# Altium PCB BLDC_Board_Layout_Alternative.PcbDoc
Units mil, origin at the board's own origin, x right, y up, seen from the top; angles counter-clockwise.
Board outline 4105.03 x 2702.53 mil, 2 copper layers (Top Layer, Bottom Layer); 100 components, 78 nets, 393 pads, 439 vias.
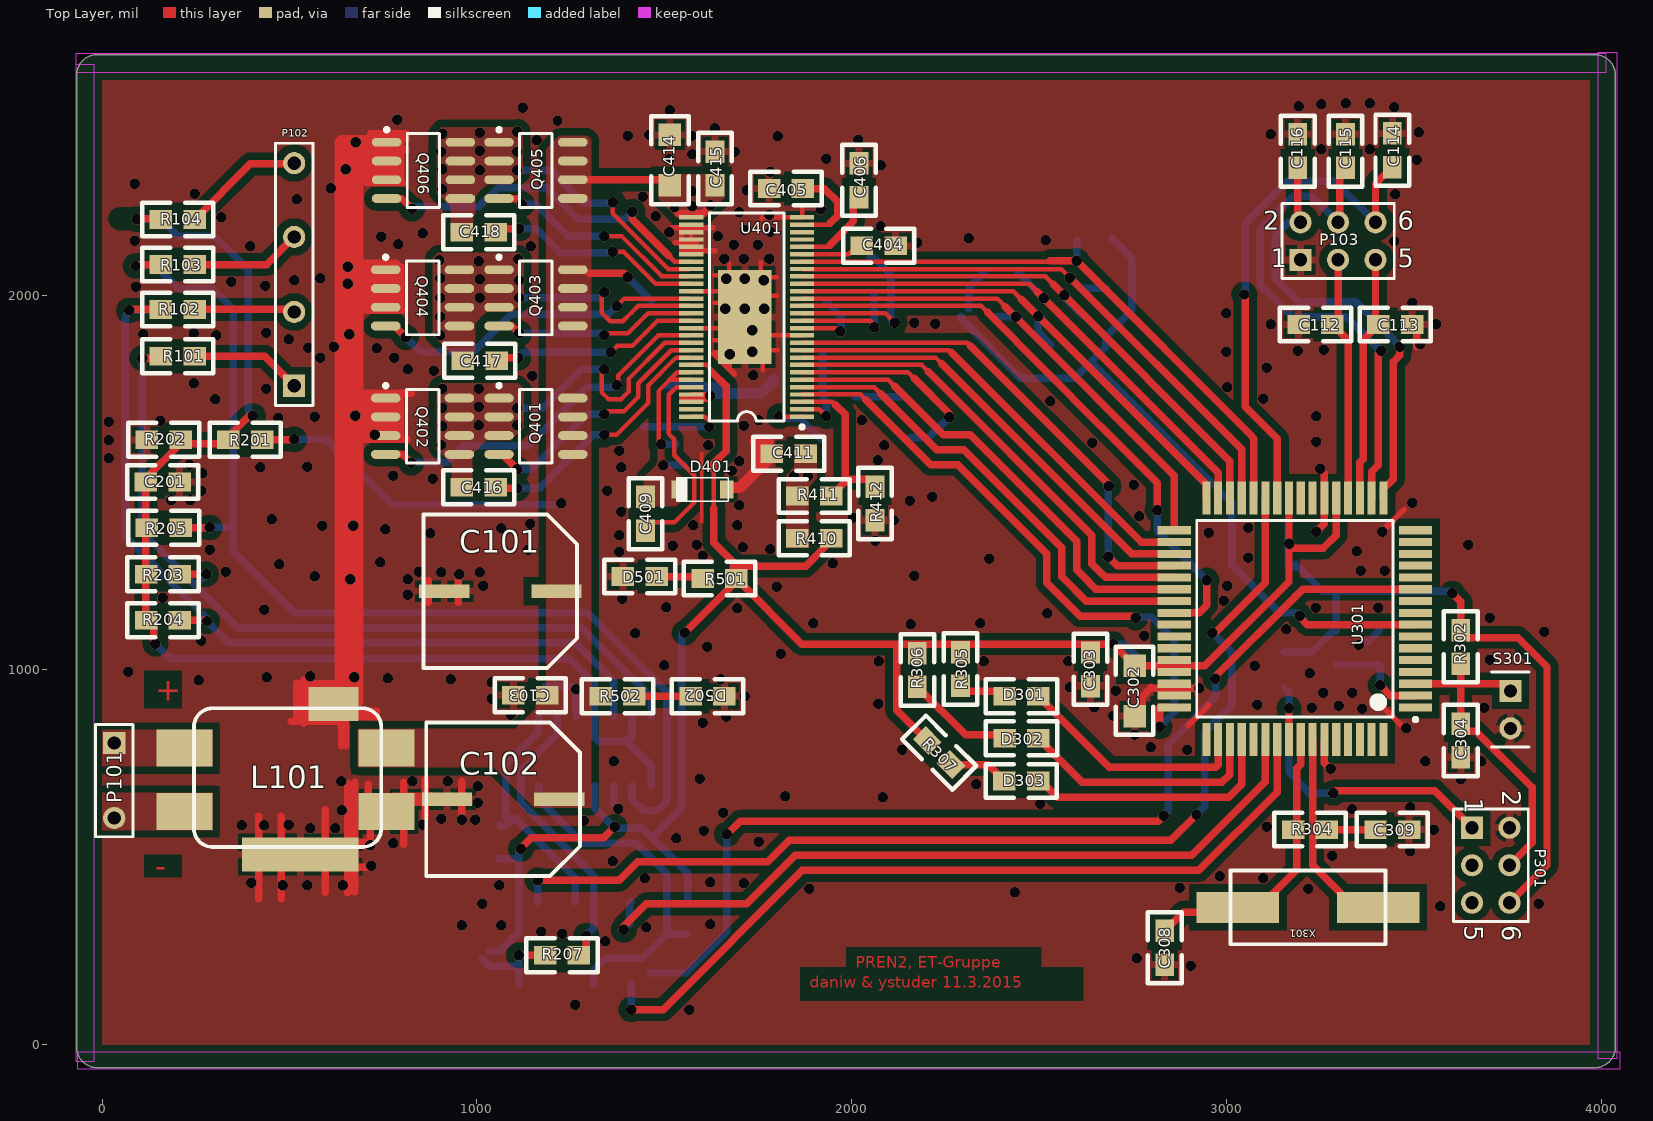
[diagram p0: Top Layer view]
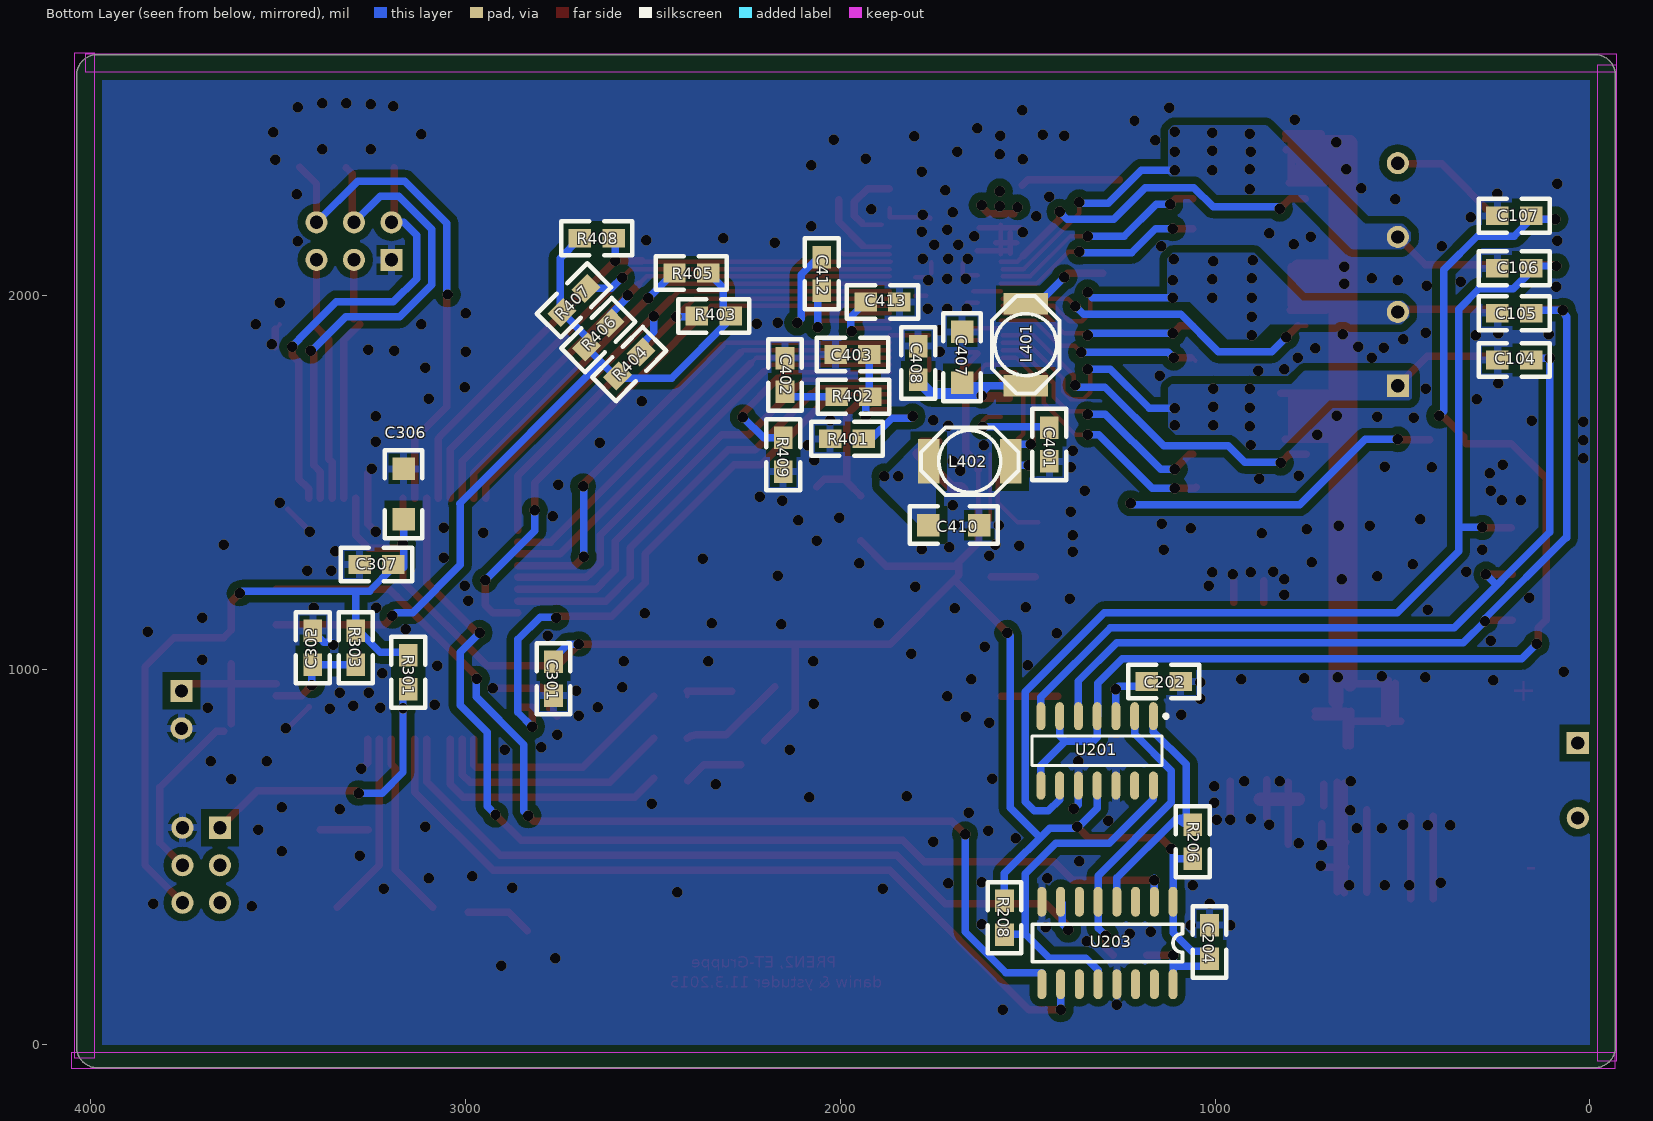
[diagram p1: Bottom Layer view, seen from below]

## Layer stack, top to bottom
Top Solder: solder mask 0.4, Solder Resist, Dk 3.5
Top Layer: signal copper 1.4
Dielectric 1: dielectric 12.6, FR-4, Dk 4.8
Bottom Layer: signal copper 1.4
Bottom Solder: solder mask 0.4, Solder Resist, Dk 3.5

## Board outline
-67.91,-6.03 ccw(c-12.89,-6.03) -12.89,-61.04 3982.11,-61.04 ccw(c3982.11,-6.03) 4037.12,-6.03 4037.12,2581.47 ccw(c4032.11,2581.47) 4036.46,2583.97 ccw(c4032.11,2586.47) 4037.12,2586.47 ccw(c3982.11,2586.47) 3982.11,2641.49 -12.89,2641.49 ccw(c-12.89,2586.47) -67.91,2586.47

## Design rules (kind name [scope] priority, off if disabled: settings)
Clearance HCS08 [(InComponent('U301')) and ispad vs (InComponent('U301')) and ispad] p1: gap=5
Clearance [All] p2: gap=20
PolygonConnect SpecGND [InNamedPolygon('SpezGND') vs OnBottomLayer Or OnTopLayer] p1: connectstyle=Direct reliefconductorwidth=10 reliefentries=4 polygonreliefangle="90 Angle" airgapwidth=10
PolygonConnect PolygonConnect_M_X [InNet('M_W') or InNet('M_V') or InNet('M_U') or InNet('VCCH') or InNet('PWR_+') or InNet('PWR_-') or InNet('VCC_OUT') or InNet('NETC409_1') vs OnBottomLayer Or OnTopLayer] p2: connectstyle=Direct reliefconductorwidth=10 reliefentries=4 polygonreliefangle="90 Angle" airgapwidth=10
PolygonConnect PolygonConnect_Via [IsVia vs OnBottomLayer Or OnTopLayer] p3: connectstyle=Direct reliefconductorwidth=10 reliefentries=4 polygonreliefangle="90 Angle" airgapwidth=10
PolygonConnect PolygonConnect_1 [All] p4: connectstyle=Relief reliefconductorwidth=20 reliefentries=4 polygonreliefangle="90 Angle" airgapwidth=10
RoutingVias [All] p1: holewidth=28 width=28 viastyle="Through Hole" minholewidth=28 minwidth=28 maxholewidth=28 maxwidth=28
SolderMaskExpansion [All] p1: expansion=4
UnpouredPolygon [All] p1: allowunpoured=FALSE
Width [All] p1: maxlimit=50 minlimit=12 preferedwidth=12
29 further rules are at their usual default settings.

## Components (designator, comment, footprint, x,y, rotation, side; value= is the part's Value field where it differs from the comment)
C101 "100uF" ElkoFootprint 1062.5,1210 r180 top
C102 "100uF" ElkoFootprint 1070,655 r180 top
C103 "100n" 0805 1187.5,932.5 r180 top
C104 "100p" 0805 157.11,1826.47 r0 bottom
C105 "100p" 0805 157.11,1951.47 r0 bottom
C106 "100p" 0805 157.11,2071.47 r0 bottom
C107 "100p" 0805 157.11,2211.47 r0 bottom
C112 "240p" 0805 3282.11,1921.47 r180 top
C113 "240p" 0805 3404.61,1921.47 r0 top
C114 "240p" 0805 3442.11,2341.47 r90 top
C115 "240p" 0805 3317.11,2338.97 r90 top
C116 "240p" 0805 3189.61,2338.97 r90 top
C201 "100n" 0805 117.11,1501.47 r0 top
C202 "100n" 0805 1182.11,968.97 r180 bottom
C204 "100n" 0805 1014.61,229 r90 bottom
C301 "100nF" 0805 2764.61,1021.47 r270 bottom
C302 "10uF" 1206 2754.61,1011.47 r270 top
C303 "100nF" 0805 2637.11,1046.47 r270 top
C304 "100nF" 0805 3624.61,856.47 r270 top
C305 "100nF" 0805 3407.11,1013.97 r90 bottom
C306 "4.7uF" 1206 3164.61,1401.47 r90 bottom
C307 "470nF" 0805 3192.11,1281.47 r0 bottom
C308 "16pF" 0805 2834.61,213.97 r90 top
C309 "16pF" 0805 3487.11,573.97 r180 top
C401 "15n" 0805 1442.11,1556.47 r90 bottom
C402 "6.8n" 0805 2147.11,1741.47 r90 bottom
C403 "120p" 0805 1922.11,1841.47 r0 bottom
C404 "1u" 0805 2027.11,2131.47 r0 top
C405 "1u" 0805 1869.61,2283.97 r180 top
C406 "240p" 0805 2019.61,2261.47 r90 top
C407 "4.7uF" 1206 1674.61,1766.47 r90 bottom
C408 "100n" 0805 1792.11,1773.97 r90 bottom
C409 "100n" 0805 1449.61,1461.47 r270 top
C410 "4.7uF" 1206 1764.61,1386.47 r180 bottom
C411 "100n" 0805 1877.11,1576.47 r180 top
C412 "22n" 0805 2049.61,2101.47 r270 bottom
C413 "2.2u" 0805 1932.11,1981.47 r180 bottom
C414 "4.7uF" 1206 1515,2292.5 r90 top
C415 "100n" 0805 1635,2382.5 r270 top
C416 "100n" 0805 960,1487.5 r0 top
C417 "100n" 0805 962.5,1825 r0 top
C418 "100n" 0805 960,2167.5 r0 top
D301 "LED" 0805 2497.5,930 r180 top
D302 "LED" 0805 2497.5,817.5 r180 top
D303 "LED" 0805 2497.11,703.97 r180 top
D401 "MBR0560" SOD-123 1602.11,1481.47 r0 top
D501 "LED" 0805 1389.61,1248.97 r0 top
D502 "LED" 0805 1660,930 r180 top
L101 "Filter" BNX 145,462.5 r0 top
L401 "1mH" SRR6603 1505,1867.5 r90 bottom
L402 "1mH" SRR6603 1654.61,1556.47 r0 bottom
P101 "PWR" Stecker_1x2_200mil 32.5,705 r270 top
P102 "Motor" Stecker_1x4_200mil 512.5,2055 r90 top
P103 "Header 3X2" HDR2X3 3197.11,2093.97 r0 top
P301 "BDM" HDR2X3 3654.61,578.97 r270 top
Q401 "Si4178DY" SO-8_N 1157.5,1650 r0 top
Q402 "Si4178DY" SO-8_N 855,1650 r0 top
Q403 "Si4178DY" SO-8_N 1157.5,1992.5 r0 top
Q404 "Si4178DY" SO-8_N 855,1992.5 r0 top
Q405 "Si4178DY" SO-8_N 1157.5,2332.5 r0 top
Q406 "Si4178DY" SO-8_N 857.5,2332.5 r0 top
R101 "33" 0805 247.11,1836.47 r180 top
R102 "33" 0805 247.11,1961.47 r180 top
R103 "33" 0805 247.11,2081.47 r180 top
R104 "33" 0805 247.11,2201.47 r180 top
R201 "1M" 0805 337.11,1613.97 r0 top
R202 "1M" 0805 119.61,1613.97 r0 top
R203 "10k" 0805 117.5,1255 r0 top
R204 "10k" 0805 117.5,1132.5 r0 top
R205 "10k" 0805 119.61,1378.97 r0 top
R206 "10k" 0805 1059.61,586.5 r270 bottom
R207 "10k" 0805 1272.11,238.97 r180 top
R208 "10k" 0805 1562.11,294 r90 bottom
R301 "4.7k" 0805 3152.11,1038.97 r270 bottom
R302 "10k" 0805 3624.61,1106.47 r270 top
R303 "10k" 0805 3292.11,1103.97 r270 bottom
R304 "10M" 0805 3177.11,573.97 r0 top
R305 "330" 0805 2290,957.5 r90 top
R306 "330" 0805 2175,955 r90 top
R307 "330" 0805 2265,747.5 r135 top
R401 "205k" 0805 1937.11,1616.47 r0 bottom
R402 "16.2k" 0805 2009.61,1728.97 r180 bottom
R403 "10k" 0805 2292.11,1943.97 r0 bottom
R404 "10k" 0805 2594.61,1783.97 r135 bottom
R405 "10k" 0805 2352.11,2058.97 r0 bottom
R406 "10k" 0805 2677.11,1861.47 r135 bottom
R407 "10k" 0805 2742.11,1953.97 r135 bottom
R408 "10k" 0805 2694.61,2151.47 r180 bottom
R409 "0" 0805 2152.11,1528.97 r90 bottom
R410 "0" 0805 1944.61,1351.47 r180 top
R411 "30k" 0805 1944.61,1463.97 r180 top
R412 "10k" 0805 2062.11,1398.97 r90 top
R501 "330" 0805 1602.11,1243.97 r0 top
R502 "1.2k" 0805 1420,930 r180 top
S301 "RST" HDR1X2 3757.11,943.97 r270 top
U201 "LM339AD" D014_L 1314.61,784 r270 bottom
U203 "MC74HC175" SO-16 1112.11,381.5 r270 bottom
U301 "MC9S08JM60CQH" QFP64(14x14) 3182.11,1136.47 r180 top
U401 "DRV8301" HTSSOP56 1714.61,1941.47 r90 top
X301 "12MHz" HC/49US 3217.11,366.47 r0 top

## Footprints (in the part's own frame and the unit in brackets; to place one, negate y for a bottom-side part, rotate by r counter-clockwise, add the part's x,y. Pads: shape width x height; smd on the part's side, far side on the other; paste and mask are expansions set on the pad)
0805 [mil]
  rect 60x50 smd: 1(0,0) 2(90,0)
  silkscreen extent -50,-45 140,45
1206 [mil]
  rect 60x60 smd: 1(0,0) 2(135,0)
  silkscreen extent -50,-50 185,50
BNX [mm]
  rect 3.8x2.5 smd: 1(1.9,8.35) 2(1.9,4.05) 4(15.6,4.05) 5(15.6,8.35)
  rect 7.9x2.3 smd: 3(9.75,1.15)
  rect 3.4x2.3 smd: 6(12,11.35)
  silkscreen extent 2.54,1.65 15.24,11.05
D014_L [mm] "SOIC, 14-Leads, Body 8.7x3.9mm, Pitch 1.27mm, IPC High Density"
  oval 1.9x0.6 smd: 1(-2.35,3.81) 2(-2.35,2.54) 3(-2.35,1.27) 4(-2.35,0) 5(-2.35,-1.27) 6(-2.35,-2.54) 7(-2.35,-3.81) 8(2.35,-3.81) 9(2.35,-2.54) 10(2.35,-1.27) 11(2.35,0) 12(2.35,1.27) 13(2.35,2.54) 14(2.35,3.81)
  silkscreen extent -2.47,-4.4 1,4.78, body extent -2,-4.38 2,4.38, height 1.75
ElkoFootprint [mm]
  rect 3.4x0.9 smd: +(-3.8,0) -(3.8,0)
  silkscreen extent -5.2,-5.2 5.21,5.21
HC/49US [mm] "ABLS HC/49US Quarz"
  rect 5.6x2.1 smd: 1(-4.75,0) 2(4.75,0)
  silkscreen extent -5.25,-2.5 5.25,2.5
HDR1X2 [mm] "Connector; Header; 2 Position"
  rect 1.5x1.5 hole 0.9: 1(0,0)
  round 1.5 hole 0.9: 2(2.54,0)
  silkscreen extent -1.27,-1.27 3.81,1.27
HDR2X3 [mm] "Connector; Header; 3x2 Position"
  rect 1.5x1.5 hole 0.9: 1(0,0)
  round 1.5 hole 0.9: 2(0,2.54) 3(2.54,0) 4(2.54,2.54) 5(5.08,0) 6(5.08,2.54)
  silkscreen extent -1.27,-1.27 6.35,3.81
HTSSOP56 [mm] "Shrink Small Outline; 56 Leads; Body Width 6.1 mm; Pitch 0.5 mm"
  rect 0.3x1.65 smd: 1(-6.75,-3.879) 2(-6.25,-3.879) 3(-5.75,-3.879) 4(-5.25,-3.879) 5(-4.75,-3.879) 6(-4.25,-3.879) 7(-3.75,-3.879) 8(-3.25,-3.879) 9(-2.75,-3.879) 10(-2.25,-3.879) 11(-1.75,-3.879) 12(-1.25,-3.879) 13(-0.75,-3.879) 14(-0.25,-3.879) 15(0.25,-3.879) 16(0.75,-3.879) 17(1.25,-3.879) 18(1.75,-3.879) 19(2.25,-3.879) 20(2.75,-3.879) 21(3.25,-3.879) 22(3.75,-3.879) 23(4.25,-3.879) 24(4.75,-3.879) 25(5.25,-3.879) 26(5.75,-3.879) 27(6.25,-3.879) 28(6.75,-3.879) 29(6.75,3.625) 30(6.25,3.625) 31(5.75,3.625) 32(5.25,3.625) 33(4.75,3.625) 34(4.25,3.625) 35(3.75,3.625) 36(3.25,3.625) 37(2.75,3.625) 38(2.25,3.625) 39(1.75,3.625) 40(1.25,3.625) 41(0.75,3.625) 42(0.25,3.625) 43(-0.25,3.625) 44(-0.75,3.625) 45(-1.25,3.625) 46(-1.75,3.625) 47(-2.25,3.625) 48(-2.75,3.625) 49(-3.25,3.625) 50(-3.75,3.625) 51(-4.25,3.625) 52(-4.75,3.625) 53(-5.25,3.625) 54(-5.75,3.625) 55(-6.25,3.625) 56(-6.75,3.625)
  rect 6.35x3.61 smd: 57(0,0)
  silkscreen extent -7.57,-4 7.05,2.41
QFP64(14x14) [mm] "QFP, 64-Leads, Body 17,5x17,5mm (max), Pitch 0,80mm, IPC Low Density"
  rect 2.25x0.55 smd: 1(-8.175,6) 2(-8.175,5.2) 3(-8.175,4.4) 4(-8.175,3.6) 5(-8.175,2.8) 6(-8.175,2) 7(-8.175,1.2) 8(-8.175,0.4) 9(-8.175,-0.4) 10(-8.175,-1.2) 11(-8.175,-2) 12(-8.175,-2.8) 13(-8.175,-3.6) 14(-8.175,-4.4) 15(-8.175,-5.2) 16(-8.175,-6) 33(8.175,-6) 34(8.175,-5.2) 35(8.175,-4.4) 36(8.175,-3.6) 37(8.175,-2.8) 38(8.175,-2) 39(8.175,-1.2) 40(8.175,-0.4) 41(8.175,0.4) 42(8.175,1.2) 43(8.175,2) 44(8.175,2.8) 45(8.175,3.6) 46(8.175,4.4) 47(8.175,5.2) 48(8.175,6)
  rect 0.55x2.25 smd: 17(-6,-8.175) 18(-5.2,-8.175) 19(-4.4,-8.175) 20(-3.6,-8.175) 21(-2.8,-8.175) 22(-2,-8.175) 23(-1.2,-8.175) 24(-0.4,-8.175) 25(0.4,-8.175) 26(1.2,-8.175) 27(2,-8.175) 28(2.8,-8.175) 29(3.6,-8.175) 30(4.4,-8.175) 31(5.2,-8.175) 32(6,-8.175) 49(6,8.175) 50(5.2,8.175) 51(4.4,8.175) 52(3.6,8.175) 53(2.8,8.175) 54(2,8.175) 55(1.2,8.175) 56(0.4,8.175) 57(-0.4,8.175) 58(-1.2,8.175) 59(-2,8.175) 60(-2.8,8.175) 61(-3.6,8.175) 62(-4.4,8.175) 63(-5.2,8.175) 64(-6,8.175)
  silkscreen extent -8.3,-6.65 6.65,6.95, body extent -7,-7 7,7, height 2.45
SO-8_N [mm] "SOIC, 8-Leads, Body 4.9x3.9mm, Pitch 1.27mm, IPC Medium Density"
  oval 2x0.6 smd: 1(-2.5,1.905) 2(-2.5,0.635) 3(-2.5,-0.635) 4(-2.5,-1.905) 5(2.5,-1.905) 6(2.5,-0.635) 7(2.5,0.635) 8(2.5,1.905)
  silkscreen extent -2.62,-2.5 1.1,2.88, body extent -2,-2.5 2,2.5, height 1.75
SO-16 [mil]
  oval 80x24 smd: 1(0,0) 2(0,-50) 3(0,-100) 4(0,-150) 5(0,-200) 6(0,-250) 7(0,-300) 8(0,-350) 9(220,-350) 10(220,-300) 11(220,-250) 12(220,-200) 13(220,-150) 14(220,-100) 15(220,-50) 16(220,0)
  silkscreen extent 60,-375 160,25
SOD-123 [mil]
  rect 36x48 smd: A(64.5,0) K(-64.5,0)
  silkscreen extent -69,-31 69,31
SRR6603 [mm]
  rect 1.45x3 smd: 1(-2.775,0) 2(2.775,0)
  silkscreen extent -3.3,-2.29 3.3,2.29
Stecker_1x2_200mil [mm]
  rect 1.5x1.5 hole 0.9: 1(-2.54,0)
  round 1.5 hole 0.9: 2(2.54,0)
  silkscreen extent -3.81,-1.27 3.81,1.27
Stecker_1x4_200mil [mm]
  rect 1.5x1.5 hole 0.9: 1(-7.54,0)
  round 1.5 hole 0.9: 2(-2.54,0) 3(2.54,0) 4(7.54,0)
  silkscreen extent -8.89,-1.27 8.89,1.27

## Part data
C101 C102: library part Elko_SMD
C103 C104 C105 C106 C107 C112 C113 C114 C115 C116 C201 C202 C204 C301 C303 C304 C305 C307 C308 C309 C401 C402 C403 C404 C405 C406 C408 C409 C411 C412 C413 C415 C416 C417 C418: library part C?, "Normaler Kondensator"
C302 C306 C407 C410 C414: library part "C? ELKO", "Elektrolyt /polarisierter Kondensator"
D401: library part DiodeSchottky, "Schottky Diode"
L101: library part CommonFilter
L401 L402: library part L?, "SRR1005-122K"
P101 S301: library part "Header 2", "Header, 2-Pin"
P102: library part "Header 4", "Header, 4-Pin"
P103: "Header, 3-Pin, Dual row"
P301: library part "Header 3X2", "Header, 3-Pin, Dual row"
Q401 Q402 Q403 Q404 Q405 Q406: library part SI4412DY, "N-Channel 30V (D-S)  Rated MOSFET"
R101 R102 R103 R104 R201 R202 R203 R204 R205 R206 R207 R208 R301 R302 R303 R304 R305 R306 R307 R401 R402 R403 R404 R405 R406 R407 R408 R409 R410 R411 R412 R501 R502: library part R?, "Normaler Widerstand"
U201: "Quad Differential Comparator"
U203: "QUAD D-TYPE FF CR"
U301: library part MC9S08JM60, "MCU"
X301: library part CRYSTAL

## Via types
v1: diameter 28, hole 28, Top Layer to Bottom Layer, tented both sides, 352 vias
v2: diameter 28, hole 28, Top Layer to Bottom Layer, 86 vias
v3: diameter 28, hole 28, Top Layer to Bottom Layer, tented bottom, 1 vias

## Nets (pads, with @x,y where several pads share a name; then routed paths per layer and width w, separated by ;. In a path a pad name is that pad's centre, name@x,y a point inside that pad or via, vN(x,y) a via of type N, cw(c..) or ccw(c..) an arc to the next point about the centre after c; other vN are vias at no path point)
BCKGD: P301.1 R301.2 U301.56 | length 872.8
  Top Layer w20: U301.56 v1(3166.36,897.22) ; v1(3284.61,671.47) 3291.11,677.97 3555.61,677.97 P301.1
  Bottom Layer w15: R301.2@3152.11,956.47 R301.2@3166.36,942.22
  Bottom Layer w20: R301.2@3166.36,942.22 v1(3166.36,897.22) 3166.36,727.22 3222.11,671.47 v1(3284.61,671.47)
CLK: C113.1 P103.5 U301.19 | length 648.6
  Top Layer w20: U301.19 3355.34,1553.77 3363.84,1562.27 3363.84,1880.7 C113.1 ; C113.1@3397.11,1928.97 P103.5
CS: C112.1 P103.3 U301.20 | length 637.9
  Top Layer w20: C112.1 3323.84,1879.74 U301.20 ; C112.1@3297.11,1936.47 P103.3
DTC: R409.2 U401.7 | length 578.1
  Top Layer w12: U401.7 2149.78,1793.83 2166.1,1777.52
  Top Layer w20: 2166.1,1777.52 2259.61,1684.01 v1(2259.61,1673.97)
  Bottom Layer w20: R409.2 2204.61,1618.97 v1(2259.61,1673.97)
EN_GATE: U301.40 U401.16 | length 1623.3
  Top Layer w12: U401.16 2345.08,1971 2362.11,1953.97
  Top Layer w20: 2362.11,1953.97 2664.14,1649.44 2814.61,1498.97 v1(2814.61,1426.47) ; U301.40 2927.22,1152.22 2947.5,1172.5 ; 2947.11,1172.5 v1(2947.11,1238.97)
  Bottom Layer w20: v1(2814.61,1426.47) 2814.61,1371.47 v1(2947.11,1238.97) v1@2947.11,1241.74
FET_H_U: R403.2 U301.33 U401.17 | length 1386.7
  Top Layer w12: U401.17 2387.89,1990.68 2409.21,1969.37
  Top Layer w20: 2409.21,1969.37 v1(2437.11,1941.47) 2860.26,1518.32 U301.33
  Bottom Layer w20: R403.2@2384.61,1941.47 v1(2437.11,1941.47)
FET_H_V: R405.2 U301.31 U401.19 | length 1482.1
  Top Layer w12: U401.19 2473.52,2030.05 2494.84,2008.74
  Top Layer w20: 2494.84,2008.74 v1(2512.11,1991.47) 2977.38,1526.19 U301.31
  Bottom Layer w20: R405.2@2444.61,2058.97 v1(2512.11,1991.47)
FET_H_W: R407.2 U301.29 U401.21 | length 1610.6
  Top Layer w12: U401.21 2559.15,2069.42 v1(2582.11,2046.47)
  Top Layer w20: v1(2582.11,2046.47) 3040.38,1588.2 U301.29
  Bottom Layer w20: v1(2582.11,2046.47) 2610.97,2017.61 R407.2
FET_L_U: R404.2 U301.32 U401.18 | length 1419.2
  Top Layer w12: U401.18 2430.71,2010.37 2452.02,1989.05
  Top Layer w20: 2452.02,1989.05 v1(2497.11,1943.97) 2945.89,1495.19 U301.32
  Bottom Layer w20: v1(2497.11,1943.97) 2497.11,1901.47 R404.2@2530.97,1867.61
FET_L_V: R406.2 U301.30 U401.20 | length 1515
  Top Layer w12: U401.20 2516.34,2049.74 2537.65,2028.42
  Top Layer w20: 2537.65,2028.42 v1(2567.11,1998.97) 3008.88,1557.2 U301.30
  Bottom Layer w20: v1(2567.11,1998.97) 2567.11,1993.97 R406.2@2613.47,1947.61
FET_L_W: R408.2 U301.28 U401.22 | length 1608.8
  Top Layer w12: U401.22@1864.82,2089.11 2529.61,2089.11
  Top Layer w20: 2529.61,2091.47 v1(2599.61,2091.47) 3067.11,1623.97 ; U301.28 3071.87,1616.23
  Bottom Layer w20: v1(2599.61,2091.47) R408.2@2599.61,2146.47
G_H_U: Q401.4 U401.47 | length 677.7
  Top Layer w12: v2(1340,1682.5) 1347.5,1690 1392.5,1690 1430.61,1728.11 1430.61,1764.97 1518.53,1852.89 U401.47@1566.89,1852.89
  Top Layer w20: Q401.4 1067.5,1575 v2(1107.5,1535)
  Bottom Layer w20: v2(1107.5,1535) 1145,1535 1292.5,1682.5 v2(1340,1682.5)
G_H_V: Q403.4 U401.42 | length 526
  Top Layer w12: v1@1345,1897.5 1402.5,1897.5 1456.47,1951.47 1457.11,1951.47 U401.42@1564.39,1951.31
  Top Layer w20: Q403.4 1092.5,1917.5 v1(1112.5,1897.5)
  Bottom Layer w20: v1(1112.5,1897.5) v1@1335,1897.5
  other v1: 1340,1892.5
G_H_W: Q405.4 U401.37 | length 593.9
  Top Layer w12: v2(1340,2157.5) 1385.81,2157.5 1493.57,2049.74 U401.37@1566.89,2049.74
  Top Layer w20: Q405.4 1105,2257.5 v2(1120,2242.5)
  Bottom Layer w20: v2(1120,2242.5) 1157.5,2242.5 1242.5,2157.5 v2(1340,2157.5)
G_L_U: Q402.4 U401.45 | length 945.6
  Top Layer w12: v2@1377.5,1772.5 1377.5,1786.31 1483.45,1892.26 U401.45@1566.89,1892.26
  Top Layer w20: Q402.4 802.5,1575 v2@817.5,1560
  Bottom Layer w20: v2@826.5,1554 921.23,1554 964.73,1597.5 1137.5,1597.5 1293.75,1753.75 1366.25,1753.75 v2(1372.5,1760)
  other v2: 825,1552.5
G_L_V: Q404.4 U401.40 | length 890.7
  Top Layer w12: Q404.4 Q404.4@780,1917.5 ; v1(1372.5,1970) 1393.18,1990.68 U401.40@1566.89,1990.68
  Top Layer w20: Q404.4@780,1917.5 v1@805,1892.5
  Bottom Layer w20: v1(810,1887.5) 849,1848.5 991,1848.5 1091,1948.5 1351,1948.5 v1(1372.5,1970)
G_L_W: Q406.4 U401.35 | length 958
  Top Layer w12: 1512.11,2104.74 1527.74,2089.11 U401.35
  Top Layer w20: Q406.4 800,2257.5 v2(827.5,2230) ; v2(1415,2222.5) 1415,2201.84 1512.11,2104.74
  Bottom Layer w20: v2(827.5,2230) 832.5,2235 1005.27,2235 1056.77,2286.5 1186,2286.5 1270,2202.5 1395,2202.5 v2(1415,2222.5)
GND: C101.- C102.- C103.2 C104.2 C105.2 C106.2 C107.2 C112.2 C113.2 C114.2 C115.2 C116.2 C201.2 C202.2 C204.2 C301.2 C302.2 C303.2 C304.2 C305.2 C306.2 C307.2 C308.1 C309.1 C401.1 C402.2 C403.2 C404.2 C405.2 C406.2 C407.2 C408.2 C410.2 C411.2 C413.2 C414.2 C415.1 D401.A D501.1 D502.1 L101.3 L101.4 L101.6 P103.1 P301.2 Q402.1 Q402.2 Q402.3 Q404.1 Q404.2 Q404.3 Q406.1 Q406.2 Q406.3 R202.1 R401.2 R409.1 R412.1 S301.2 U201.10 U201.12 U203.8 U203.13 U301.22 U301.46 U301.47 U301.59 U401.12 U401.28 U401.30 U401.31 U401.32 U401.33 U401.34 U401.39 U401.44 U401.57 | length 11605.4
  Top Layer w10: 1599.61,1394.99 1599.61,1576.47
  Top Layer w12: U401.44 U401.57@1657.58,1911.94 ; U401.39 U401.57@1645.71,2010.37 ; U401.34 U401.33 U401.32 U401.31 U401.30 ; 1632.5,1847.5 U401.57@1662.5,1847.5 ; 1632.5,1880 U401.57@1662.5,1880 ; 1632.5,1980 U401.57@1662.5,1980 ; 1632.5,2052.5 U401.57@1662.5,2052.5 ; U401.57@1672.5,2055 1672.5,2085 ; 1675,1805 U401.57@1675,1835 ; U401.57@1757.5,2057.5 1757.5,2087.5 ; 1759.61,2203.97 cw(c1762.86,2203.97) 1762.86,2207.22 U401.28 1867.32,2231.47 ; 1762.5,1800 U401.57@1762.5,1830 ; U401.57@1763.82,1892.26 U401.12 ; U401.57@1770,1997.5 1800,1997.5 ; U401.57@1770,2047.5 1800,2047.5 ; U401.57@1772.5,1852.5 1802.5,1852.5 ; C113.2 C113.2@3507.11,1908.97
  Top Layer w15: v1@1519.39,2178.91 1629.61,2179.06 ; 1529.82,2139.13 1584.82,2139.13 ; U401.34@1546.95,2111.69 U401.31@1546.95,2166.69 ; 1547.11,2118.64 1634.61,2118.64 ; 1631.65,1843.97 1686.65,1788.97 ; 2897.5,851.41 2952.5,906.41 ; 3417.11,901.02 v1@3472.11,846.02 ; v1@3419.15,1373.97 3474.15,1428.97
  Top Layer w20: 417.5,390 417.5,610 ; 477.5,390 477.5,610 ; 505.06,863.43 635.06,863.43 ; 520,870 520,965 ; 537.5,857.5 537.5,972.5 ; 547.5,867.5 547.5,962.5 639.7,962.5 ; 595,407.5 595,627.5 ; L101.6@637.5,875 732.5,875 ; L101.6@637.5,890 640,797.5 ; 650,797.5 650,890 732.5,890 ; L101.3@651.87,473.29 v1@709.37,473.29 ; L101.3@651.87,539.65 v1@709.37,539.65 ; 655,405 655,697.5 ; L101.6@670,875 670,1095 ; 674.37,407.74 674.37,700.24 ; 695,1615 812.5,1615 ; 705,1960 800,1960 ; 707.5,2300 802.5,2300 ; L101.4@710,637.5 710,695 ; v1(715,532.5) L101.4@715,590 ; 715,2387.5 810,2387.5 ; 716.57,2417.5 811.57,2417.5 ; 716.57,2429.74 811.57,2429.74 ; 730,1737.5 825,1737.5 ; Q402.3@795,1627.5 795,1730 ; 797.5,1972.5 797.5,2075 ; Q406.3@797.5,2307.5 Q406.1@797.5,2410 ; 805,535 805,700 ; 862.5,605 862.5,707.5 ; 870,1180 870,1237.5 ; 950,1180 950,1237.5 ; v1(960,600) 960,702.5 ; 1737.5,1610 1782.5,1610 ; 1750,1555 1750,1600 ; C302.2 2774.61,896.47 2774.61,928.97 2799.55,953.91 ; 2802.37,951.09 v1(2927.11,951.09) v1@2924.28,953.91 ; v1(3239.61,1368.97) 3260.85,1390.21 U301.22 3260.85,1525.23 v1(3249.61,1536.47) ; U301.59 3260.85,752.73 v1(3277.11,736.47) ; v1@3507.11,1861.47 C113.2@3507.11,1908.97
  Top Layer w30: D401.A@1673.11,1481.47 1678.11,1486.47 1702.11,1486.47 C411.2@1792.11,1576.47
  Top Layer w35: L101.4@777.5,655 C102.-@880,655
  Top Layer w40: 639.7,962.5 639.7,2407.5 Q406.1@780,2407.5 ; 639.7,1632.5 Q402.3@780,1632.5 ; 639.7,1655 780,1655 ; 639.7,1677.5 Q402.2@780,1677.5 ; 639.7,1705 780,1705 ; 639.7,1727.5 Q402.1@780,1727.5 ; 639.7,1975 Q404.3@780,1975 ; 639.7,1992.5 780,1992.5 ; 639.7,2017.5 Q404.2@780,2017.5 ; 639.7,2047.5 780,2047.5 ; 639.7,2075 Q404.1@780,2075 ; 639.7,2315 Q406.3@780,2315 ; v2@639.7,2330 780,2330 ; 639.7,2370 780,2370 ; L101.6@677.2,917.5 v2(677.2,2407.5)
  Bottom Layer w20: 1364.61,640.14 U201.10 ; v1(3352.11,1066.47) 3359.61,1073.97 3377.11,1073.97 C305.2
  Bottom Layer w30: C407.2 1672.11,1903.97 C407.2@1674.61,1906.47
  other v1: 1567.11,93.97 1262.11,106.47 2904.61,211.47 2759.61,231.47 1342.11,276.47 1227.11,296.47 1172.11,301.47 1452.11,313.97 959.61,318.97 1064.61,318.97 1622.11,321.47 3569.61,368.97 1014.61,376.47 3832.11,376.47 2435,407.5 1887.11,416.47 3217.11,416.47 2874.61,418.97 482.5,425 547.5,425 642.5,425 1060,425 1712.11,431.47 397.5,432.5 1622.11,433.97 1447.11,443.97 3097.11,443.97 2982.11,448.97 717.5,477.5 1362.11,488.97 3282.11,503.97 3489.61,516.47 777.5,537.5 1752.11,541.47 1532.11,551.47 1604.61,571.47 3552.11,573.97 555,577.5 622.5,577.5 3107.11,581.47 372.5,585 432.5,585 497.5,587.5 855,587.5 1285,597.5 995,600 905,602.5 1657.11,618.97 640,625 3334.61,628.97 1377.5,630 3489.61,633.97 2502.5,642.5 1002.5,645 2082.5,660 1822.5,662.5 1002.5,690 2332.5,695 637.5,702.5 827.5,702.5 922.5,702.5 3624.61,708.97 1595,710 1364.61,756.47 3529.61,756.47 3679.61,756.47 2894.61,786.47 2135,787.5 2797.11,793.97 2754.61,826.47 3479.61,843.97 1602.11,858.97 1665,875 2697.5,877.5 1090,880 3362.11,896.47 3227.11,898.97 3687.11,898.97 2647.5,900 3299.61,903.97 3082.11,906.47 2070,910 1040,922.5 1715,930 3257.11,938.97 3334.61,938.97 2704.61,943.97 2582.11,953.97 1040,967.5 257.5,972.5 930,975 1650,975 762.5,977.5 440,980 672.5,980 555,982.5 3222.11,991.47 70,995 3074.61,1011.47 1500,1012.5 2072.5,1022.5 2352.5,1022.5 2577.5,1022.5 3702.11,1026.47 1810,1042.5 1614.61,1061.47 265,1077.5 2779.61,1091.47 1422.5,1097.5 3847.11,1101.47 3159.61,1108.97 2157.11,1121.47 1897.11,1123.97 2342.11,1123.97 3702.11,1138.97 2522.11,1151.47 432.5,1160 1694.61,1163.97 3237.11,1166.47 3404.61,1166.47 1505,1167.5 2992.11,1183.97 1387.5,1190 162.5,1192.5 815,1200 1799.61,1221.47 3002.11,1223.97 1017.5,1225 662.5,1242.5 815,1242.5 567.5,1250 2167.11,1251.47 952.5,1255 905,1260 1007.5,1260 330,1262.5 845,1262.5 3357.11,1263.97 3422.11,1263.97 472.5,1282.5 1949.61,1283.97 742.5,1287.5 2367.11,1296.47 3057.11,1298.97 1602.11,1303.97 1380,1315 3347.11,1316.47 287.5,1320 1137.5,1320 1782.11,1321.47 1709.64,1326.73 1522.11,1331.47 1587.11,1333.97 3644.61,1333.97 2062.11,1343.97 1379.61,1358.97 875,1365 2952.11,1366.02 3414.61,1368.97 755,1375 1065,1377.5 3057.11,1378.97 587.5,1385 670,1385 1577.11,1386.47 1694.61,1386.47 1142.5,1390 2112.11,1398.97 452.5,1402.5 2002.11,1406.47 2767.5,1410 1384.61,1421.47 1699.61,1438.97 3494.61,1446.47 2154.61,1451.47 185,1452.5 235,1452.5 2214.61,1461.47 265,1477.5 1347.5,1477.5 267.5,1525 1679.61,1531.47 422.5,1540 1385,1540 547.5,1542.5 232.5,1547.5 1699.61,1556.47 2069.61,1558.97 17.5,1565 1380,1585 1617.11,1598.97 2087.11,1598.97 2642.11,1606.47 3239.61,1608.97 17.5,1612.5 1712.11,1651.47 17.5,1662.5 155,1665 1752.11,1666.47 2027.11,1666.47 3239.61,1676.47 2529.61,1716.47 302.5,1722.5 3097.11,1723.97 437.5,1750 3002.11,1753.97 1147.5,1785 1737.11,1786.47 3107.11,1806.47 1674.61,1841.47 1734.61,1848.97 2999.61,1848.97 3189.61,1851.47 3259.61,1853.97 3517.11,1868.97 305,1892.5 437.5,1900 1734.61,1906.47 3117.11,1921.47 3559.61,1921.47 2222.11,1923.97 2167.11,1926.47 2999.61,1951.47 1662.11,1963.97 1714.61,1963.97 1767.11,1963.97 3494.61,1978.97 435,2025 1764.61,2038.97 1664.61,2043.97 1714.61,2043.97 582.5,2045 1659.61,2096.47 1712.11,2096.47 1779.61,2096.47 395,2130 1143.5,2130 1684.61,2133.97 1749.61,2133.97 2174.61,2138.97 3447.11,2143.97 2517.11,2146.47 2312.11,2151.47 1642.11,2156.47 1512.5,2167.5 1782.11,2168.97 1714.61,2173.97 2077.11,2183.97 1477.5,2210 1779.61,2213.97 1699.61,2221.47 1917.11,2228.97 3449.61,2268.97 1719.61,2278.97 1782.11,2328.97 2077.11,2346.47 3507.11,2361.47 1512.5,2362.5 1932.11,2363.97 1575,2375 1687.5,2382.5 3252.11,2388.97 3382.11,2388.97 1160,2412.5 2017.11,2413.97 1802.11,2423.97 1402.5,2425 1572.5,2425 1460,2427.5 3117.11,2428.97 3512.11,2433.97 1635,2445 1215,2465 1515,2492.5 1122.5,2500 3447.11,2501.47 3192.11,2503.97 3252.11,2508.97 3317.11,2511.47 3382.11,2511.47
  other v2: 882.5,1510 777.5,1517.5 727.5,1627.5 470,1672.5 567.5,1675 675,1677.5 245,1765 885,1797.5 815,1802.5 582.5,1832.5 780,1832.5 732.5,1857.5 550,1860 617.5,1862.5 497.5,1882.5 110,1895 660,1895 245,1897.5 90,2022.5 655,2030 345,2035 512.5,2040 655,2075 790,2135 87.5,2145 745,2155 855,2165 317.5,2207.5 520,2255 1442.5,2262.5 247.5,2270 610,2285 87.5,2297.5 650,2335 787.5,2467.5
  other v3: 2752.11,1493.97
HALL_U: U203.2 U301.27 | length 2852.5
  Top Layer w20: v1(1162.11,439) 1379.91,439 1428.88,487.97 1775.47,487.97 1832.72,545.22 2850.86,545.22 v1(2919.61,613.97) ; v1@2969.61,1098.97 3103.37,1232.73 U301.27
  Bottom Layer w20: U203.2 v1(1162.11,439) v1@1162.11,444 ; v1(2919.61,613.97) 2941.97,636.33 2941.97,834.11 3013.61,905.74 3013.61,1047.47 v1(2962.11,1098.97)
HALL_V: U203.7 U301.54 | length 2077.2
  Top Layer w20: v1(1392.11,306.47) 1392.11,316.2 1451.92,376 1720.07,376 1849.29,505.22 2907.43,505.22 3103.37,701.16 U301.54
  Bottom Layer w20: v1(1392.11,306.47) 1408.11,322.47 1408.11,377.5 U203.7
HALL_W: U203.10 U301.55 | length 2171
  Top Layer w20: v1(1412.11,93.97) 1497.11,93.97 1868.36,465.22 2925.86,465.22 3134.86,674.23 U301.55
  Bottom Layer w20: v1(1412.11,93.97) U203.10
IRQ: C114.1 P103.6 U301.26 | length 1370.3
  Top Layer w20: v1@3049.61,1998.97 3049.61,1701.47 3134.86,1616.21 U301.26 ; P103.6 3397.11,2296.47 C114.1
  Bottom Layer w20: v1@3049.61,2003.33 3049.61,2192.11 3161.47,2303.97 3287.11,2303.97 P103.6
  other v1: 3047.11,2001.47
IRQ/TPMCLK: C305.1 R303.2 U301.2 | length 276.7
  Top Layer w20: v1(3409.61,958.97) 3436.83,931.75 U301.2
  Bottom Layer w20: R303.2 C305.1 3409.61,1011.47 v1(3409.61,958.97)
LED0: D301.1 U301.50 | length 629
  Top Layer w20: D301.1 2687.17,740.33 2970.97,740.33 2977.38,746.75 U301.50
LED1: D302.1 U301.51 | length 662.2
  Top Layer w20: D302.1 2614.67,700.33 2987.54,700.33 3007.95,720.74 3008.88,720.74 U301.51
LED2: D303.1 U301.52 | length 698.6
  Top Layer w20: D303.1@2497.11,711.47 2548.25,660.33 3005.97,660.33 3040.38,694.74 U301.52
LED_3V3: D501.2 R501.1 | length 117.5
  Top Layer w20: D501.2 R501.1@1597.11,1248.97
LED_HV: D502.2 R502.1 | length 150
  Top Layer w20: R502.1 D502.2
M_U: C416.1 P102.1 Q401.1 Q401.2 Q401.3 Q402.5 Q402.6 Q402.7 Q402.8 R101.1 U401.46 | length 962.7
  Top Layer w12: v2(1340,1802.5) 1332.5,1795 1332.5,1740.93 1350.93,1722.5 1385,1722.5 1404.61,1742.11 1404.61,1776.26 1500.92,1872.57 U401.46@1566.89,1872.57
  Top Layer w20: R101.1 434.18,1836.47 P102.1
  Bottom Layer w20: v2(1107.5,1697.5) 1175,1697.5 1280,1802.5 v2(1340,1802.5)
  other v2: 905,1600 907.5,1650 1005,1652.5 1107.5,1652.5 907.5,1700 1005,1702.5 907.5,1750 1005,1750
M_U_CMP: R206.1 U201.1 U203.4 | length 672.4
  Bottom Layer w20: R206.1 1065.39,580.72 1103.82,603.22 ; U201.1 1164.61,835.57 1077.11,748.07 1077.11,607.43 1103.82,603.22 ; U203.4 1262.11,444.93 1103.82,603.22
M_U_FILT: C104.1 R101.2 R203.2 U201.7 | length 2252.3
  Top Layer w20: v2(107.11,1831.47) 152.11,1831.47 R101.2 ; R203.2 v2(277.5,1255)
  Bottom Layer w20: C104.1@146.03,1831.47 v2(107.11,1831.47) 107.11,1367.89 362.5,1112.5 1279.07,1112.5 1464.61,926.96 U201.7 ; 251.25,1228.75 v2(277.5,1255)
M_V: C417.1 P102.2 Q403.1 Q403.2 Q403.3 Q404.5 Q404.6 Q404.7 Q404.8 R102.1 U401.41 | length 788.4
  Top Layer w12: v1@1332.5,1997.5 1332.5,1953.43 1355.93,1930 1389.07,1930 1412.5,1953.43 1430.81,1971.58 U401.41@1566.89,1971
  Top Layer w20: R102.1 506.03,1961.47 P102.2
  Bottom Layer w20: v1(1112.5,1992.5) 1327.5,1992.5
  other v1: 902.5,1892.5 902.5,1942.5 902.5,1992.5 1007.5,1992.5 1340,2007.5 1112.5,2040 1007.5,2042.5 902.5,2045 1005,2090 900,2092.5 1110,2095
M_V_CMP: R207.1 U201.2 U203.5 | length 775.3
  Top Layer w20: R207.1 1292.11,258.97 v1(1292.11,291.5)
  Bottom Layer w20: U201.2 1214.61,829 1117.11,731.5 1117.11,646.5 1312.11,451.5 U203.5 1312.11,311.5 v1(1292.11,291.5)
M_V_FILT: C105.1 R102.2 R204.2 U201.5 | length 2419.5
  Top Layer w20: v2(72.11,1958.97) 74.61,1961.47 R102.2 ; R204.2 277.5,1132.5 v2(280,1130)
  Bottom Layer w20: C105.1@164.61,1958.97 v2(72.11,1958.97) 62.5,1941.86 62.5,1352.5 64.73,1352.5 280,1137.23 v2(280,1130) 337.5,1072.5 1262.5,1072.5 1364.61,970.39 U201.5
M_W: C418.1 P102.3 Q405.1 Q405.2 Q405.3 Q406.5 Q406.6 Q406.7 Q406.8 R103.1 U401.36 | length 883.8
  Top Layer w12: v2(1362.5,2247.5) 1362.5,2217.57 1510.65,2069.42 U401.36@1566.89,2069.42
  Top Layer w20: R103.1 438.97,2081.47 P102.3
  Bottom Layer w20: v2(1107.5,2332.5) 1197.5,2332.5 1285,2245 1360,2245 v2(1362.5,2247.5)
  other v2: 907.5,2282.5 1007.5,2332.5 907.5,2335 905,2382.5 1107.5,2382.5 1007.5,2385 907.5,2430 1007.5,2432.5 1107.5,2435
M_W_CMP: R208.1 U201.14 U203.12 | length 946.8
  Bottom Layer w20: U201.14 1164.61,655.57 1282.71,537.47 1425.11,537.47 1506.11,456.47 1506.11,295.5 ; U203.12 1312.11,198.9 1344.71,231.5 1442.11,231.5 1506.11,295.5 ; R208.1@1560.61,295.5 1506.11,295.5
M_W_FILT: C106.1 R103.2 R205.2 U201.9 | length 2922.4
  Top Layer w20: v2(90,2077.5) 93.97,2081.47 R103.2 ; R205.2 v2@286.47,1378.97
  Bottom Layer w20: v2(90,2077.5) 151.08,2077.5 C106.1 157.11,2064.04 204.68,2016.47 296.03,2016.47 350,1962.5 350,1380 ; v2(287.5,1380) 350,1380 ; U201.9 1414.61,654.15 1444.68,624.08 1481.93,624.08 1506.42,648.57 1506.42,941.72 1295.64,1152.5 514.36,1152.5 350,1316.86 350,1380
MISO: C116.1 P103.2 U301.17 | length 1163.1
  Top Layer w20: P103.2@3189.61,2201.47 C116.1 ; U301.17 3418.33,1482.69 3444.61,1508.97 3444.61,1821.47 3462.11,1838.97 v1(3462.11,1861.47)
  Bottom Layer w20: P103.2 3164.61,2193.97 3129.61,2158.97 3129.61,2043.97 3191.79,1981.79 3344.29,1981.79 3443.22,1882.86 3443.22,1882.58 v1@3462.11,1863.7
MOSI: C115.1 P103.4 U301.18 | length 1365.7
  Top Layer w20: P103.4@3302.11,2198.97 3302.11,2323.97 C115.1 ; U301.18 3386.83,1528.69 3403.84,1545.7 3403.84,1843.2 v1(3412.11,1851.47)
  Bottom Layer w20: P103.4 3227.11,2263.97 3178.04,2263.97 3089.61,2175.54 3089.61,2027.4 3175.22,1941.79 3319.29,1941.79 v1@3410.86,1850.22
NetC308_2: C308.2 R304.1 U301.57 X301.1 | length 673
  Top Layer w20: C308.2 2884.61,353.97 X301.1@2992.6,353.97 ; X301.1@3086.47,366.47 3187.5,467.5 3187.5,737.5 3197.86,747.86 U301.57
NetC309_2: C309.2 R304.2 U301.58 X301.2 | length 622.2
  Top Layer w20: U301.58 3229.35,478.97 X301.2@3341.85,366.47 ; R304.2@3259.61,573.97 C309.2@3387.11,573.97
NetC401_2: C401.2 U401.56 | length 242.6
  Top Layer w12: U401.56 1607.86,1675.72 1619.61,1663.97 v1(1619.61,1648.97)
  Bottom Layer w20: C401.2@1444.61,1648.97 v1(1619.61,1648.97)
NetC402_1: C402.1 R402.1 | length 125
  Bottom Layer w20: R402.1 C402.1@2134.61,1728.97
NetC403_1: C403.1 R402.2 U401.2 | length 240.3
  Top Layer w12: U401.2 1913.17,1695.41 v1(1932.11,1676.47)
  Bottom Layer w12: R402.2 R402.2@1932.11,1716.47
  Bottom Layer w20: R402.2@1922.11,1731.47 C403.1 ; v1(1932.11,1676.47) R402.2@1932.11,1716.47
NetC404_1: C404.1 U401.23 | length 135.5
  Top Layer w12: U401.23 1991.93,2108.79 C404.1@1999.61,2116.47
NetC405_1: C405.1 U401.27 | length 223.2
  Top Layer w12: U401.27@1889.82,2187.53 1942.11,2187.53
  Top Layer w20: C405.1 1927.11,2283.97 1962.11,2248.97 1962.11,2211.74 1943.22,2192.86
NetC409_1: C409.1 D401.K L402.1 U401.50 U401.51 | length 394.4
  Top Layer w12: v1@1484.61,1603.97 1484.61,1743.97 1534.47,1793.83 U401.50 ; 1519.43,1774.15 U401.51
  Bottom Layer w20: v1(1492.11,1601.47) L402.1@1530.36,1601.47 ; v1(1497.11,1546.47) L402.1@1552.86,1546.47
NetC409_2: C409.2 U401.52 | length 513
  Top Layer w12: C409.2@1472.11,1393.97 1527.11,1393.97 1579.61,1446.47 1579.61,1518.97 1526.11,1572.47 1526.11,1615.55 1512.11,1629.55 1512.11,1733.97 1532.6,1754.46 U401.52
NetC412_1: C412.1 U401.15 | length 463.8
  Top Layer w12: U401.15 2089.76,1951.31 v1(2114.61,1926.47)
  Bottom Layer w20: C412.1 2057.03,2101.47 2104.61,2053.9 2104.61,1936.47 v1(2114.61,1926.47)
NetC412_2: C412.2 U401.14 | length 294.6
  Top Layer w12: U401.14 2049.45,1931.63 v1@2067.11,1913.97
  Bottom Layer w20: v1(2059.61,1913.97) C412.2@2059.61,2001.47
NetC413_1: C413.1 U401.13 | length 199.9
  Top Layer w12: U401.13 v1@1972.11,1911.94
  Bottom Layer w20: C413.1 1972.11,1941.47 1972.11,1906.47 v1(1969.61,1903.97)
NetC416_2: C416.2 U401.48 | length 689.6
  Top Layer w12: v2(1340,1627.5) 1372.5,1627.5 1456.61,1711.61 1456.61,1758.47 1531.34,1833.2 U401.48@1566.89,1833.2
  Top Layer w20: C416.2 1052.5,1485 v2(1107.5,1485)
  Bottom Layer w20: v2(1107.5,1485) 1167.5,1485 1170,1487.5 1310,1627.5 v2(1340,1627.5)
NetC417_2: C417.2 U401.43 | length 562.1
  Top Layer w12: C417.2 C417.2@1062.5,1835 ; v1(1357.5,1847.5) 1375,1865 1415,1865 1481.63,1931.63 U401.43
  Top Layer w20: C417.2@1065,1832.5 v1(1110,1832.5)
  Bottom Layer w20: v1(1110,1832.5) 1125,1847.5 v1(1357.5,1847.5)
NetC418_2: C418.2 U401.38 | length 574.2
  Top Layer w12: v2(1362.5,2115) 1391.54,2115 1476.48,2030.05 U401.38
  Top Layer w20: C418.2@1060,2177.5 v2(1112.5,2177.5)
  Bottom Layer w20: v2(1112.5,2177.5) 1158.5,2177.5 1222.5,2113.5 1361,2113.5 v2(1362.5,2115)
NetD301_2: D301.2 R305.1 | length 130
  Top Layer w12: D301.2 D301.2@2407.5,942.5
  Top Layer w20: R305.1@2290,942.5 D301.2@2407.5,942.5
NetD302_2: D302.2 R306.1 | length 288.1
  Top Layer w20: R306.1 2303.53,826.47 2385.84,826.47 cw(c2385.84,795.84) D302.2
NetD303_2: D303.2 R307.1 | length 160.1
  Top Layer w20: R307.1 2363.58,747.5 D303.2
NetR401_1: R401.1 U401.1 | length 193.3
  Top Layer w12: v1@1808.86,1675.72 U401.1
  Bottom Layer w20: v1(1807.11,1676.47) 1811.61,1671.97 1861.61,1671.97 R401.1@1917.11,1616.47
NFAULT: U301.38 U401.6 | length 1269.2
  Top Layer w12: U401.6 2097.2,1774.15 2114.52,1756.84
  Top Layer w20: 2114.52,1756.84 2243.62,1627.74 2315.88,1627.74 2600.61,1343.01 2600.61,1266.68 2635.21,1232.07 ; 2634.88,1231.47 2651.14,1215.21 U301.38
NOCTW: U301.39 U401.5 | length 1274.6
  Top Layer w12: U401.5 2060.32,1754.46 2077.71,1737.07
  Top Layer w20: 2077.71,1737.07 2227.05,1587.74 2299.31,1587.74 2560.61,1326.44 2560.61,1249.18 2626.07,1183.71 U301.39
PWM: R403.1 R404.1 R405.1 R406.1 R407.1 R408.1 U301.8 | length 2201.2
  Top Layer w20: v1@3194.61,1141.47 3215.36,1120.72 U301.8
  Bottom Layer w20: R403.1 2292.11,1936.54 2449.93,1778.72 2594.61,1778.72 R404.1 2599.61,1783.97 R406.1 2677.11,1888.97 2747.36,1959.22 2747.36,2098.72 R408.1 ; R403.1@2312.11,1963.97 2312.11,2018.97 R405.1 ; 2638.36,1820.72 3015.61,1443.47 3013.11,1440.97 3013.11,1280.47 3140.61,1152.97 3185.61,1152.97 v1(3194.61,1143.97)
PWM_N: U203.9 U301.11 | length 2745.9
  Top Layer w20: v1(1667.11,561.47) 1702.11,596.47 2817.11,596.47 v1(2832.11,611.47) ; v1@2969.61,982.4 3181.64,1194.44 ; 3183.68,1196.47 3184.61,1196.47 3203.35,1215.21 U301.11
  Bottom Layer w20: U203.9@1462.11,191.5 1558.31,191.5 1558.31,192.77 1667.11,301.57 v1(1667.11,561.47) ; v1(2832.11,611.47) 2843.61,622.97 2843.61,800.74 2971.11,928.24 v1@2971.11,974.97
  other v1: 2969.61,976.47
PWR_+: L101.1 P101.1
PWR_-: L101.2 P101.2
PWRGD: U301.48 U401.4 | length 1635.3
  Top Layer w12: U401.4 2023.44,1734.78 2036.93,1721.29
  Top Layer w20: 2036.93,1721.29 2210.48,1547.74 2282.74,1547.74 2520.61,1309.87 2520.61,1232.61 2609.5,1143.71 v1@2749.61,1143.71 ; v1(2822.11,848.97) 2822.11,900.25 U301.48
  Bottom Layer w20: v1@2758.61,1140.47 2800.61,1140.47 2859.61,1081.47 2859.61,886.47 v1(2822.11,848.97)
  other v1: 2757.11,1138.97
R\S\T\: C304.1 P301.4 R302.2 S301.1 U301.3 | length 858.4
  Top Layer w20: U301.3 3624.61,963.24 ; C304.1 3624.61,963.24 ; R302.2 3624.61,963.24 ; C304.1@3644.61,836.47 3664.61,836.47 3814.61,686.47 3814.61,538.97 P301.4 ; S301.1@3737.84,963.24 3624.61,963.24
REF: C406.1 U401.24 | length 221.2
  Top Layer w12: U401.24 1940.86,2128.48
  Top Layer w20: 1940.86,2132.72 2004.61,2196.47 C406.1@2004.61,2253.97
SPI_CLK: U301.36 U401.11 | length 1376.5
  Top Layer w12: U401.11 2308.51,1872.57 2334.61,1846.47
  Top Layer w20: 2315.86,1865.22 2334.61,1846.47 v1@2686.79,1494.29 ; v1(2684.61,1301.47) 2707.88,1278.2 U301.36
  Bottom Layer w20: v1(2684.61,1301.47) v1@2684.61,1490
  other v1: 2686,1490
SPI_CS: U301.37 U401.8 | length 1272.4
  Top Layer w12: U401.8 2186.66,1813.52 2204.16,1796.02
  Top Layer w20: 2204.16,1796.02 2640.61,1359.57 2640.61,1283.24 2664.61,1259.24 2677.15,1246.71 U301.37
SPI_DSI: U301.35 U401.9 | length 1209.8
  Top Layer w12: U401.9 2223.55,1833.2 2239.94,1816.81
  Top Layer w20: 2239.94,1816.81 2747.05,1309.7 U301.35
SPI_DSO: U301.34 U401.10 | length 1187.5
  Top Layer w12: U401.10 2260.43,1852.89
  Top Layer w20: 2266.98,1846.34 2772.13,1341.19 2794.21,1341.19 ; 2802.38,1341.19 U301.34
STERNP: C107.1 C201.1 R104.2 R201.1 R202.2 R203.1 R204.1 R205.1 U201.4 U201.6 U201.8 | length 3256.3
  Top Layer w20: v2(92.5,2202.5) 92.5,2203.97 R104.2@142.11,2203.97 ; C201.1 117.11,1132.89 R204.1 137.5,1112.5 137.5,1075 v2(142.5,1070) ; C201.1@117.11,1511.47 209.61,1603.97 R201.1@329.61,1603.97 ; R201.1 337.11,1621.4 393.21,1677.5 v2(402.5,1677.5)
  Bottom Layer w20: v2(92.5,2202.5) 157.5,2202.5 202.5,2157.5 203.65,2157.5 204.68,2156.47 298.97,2156.47 300,2157.5 390,2067.5 390,1690 v2(402.5,1677.5) ; v2(142.5,1070) 182.28,1030.22 1247.11,1030.22 1313.11,964.22 1313.11,878.02 U201.4 1314.61,820.08 1325.57,809.12 1399.46,809.12 ; U201.6 1414.61,824.27 1399.46,809.12 ; U201.8 1464.61,743.97 1399.46,809.12
STERNP_EXT: P102.4 R104.1 | length 327.7
  Top Layer w20: R104.1 395.64,2350 510.65,2350 P102.4
VCC: C204.1 C301.1 C302.1 C303.1 C306.1 C307.1 P301.6 R206.2 R207.2 R208.2 R301.1 R302.1 R303.1 R305.2 R306.2 R307.2 R410.1 R501.2 U201.11 U203.1 U203.16 U301.21 U301.25 U301.44 U301.45 U401.49 | length 7454.7
  Top Layer w12: U401.49 1612.56,1813.52 1627.11,1798.97 1627.11,1794.55 ; 1632.11,1431.54 1632.11,1533.97
  Top Layer w20: v1(1112.11,238.97) R207.2 ; v1(1117.5,522.5) 1115.64,522.5 1145.32,552.18 1337.82,552.18 v1(1367.11,581.47) ; v1(1554.61,1098.97) R501.2@1692.11,1236.47 ; 1627.11,1794.55 1664.61,1757.05 1664.61,1583.97 1632.11,1551.47 1632.11,1533.97 ; 1632.11,1431.54 1632.11,1338.97 1683.36,1287.72 ; R410.1@1944.61,1344.04 1877.03,1276.47 1694.61,1276.47 1683.36,1287.72 ; R307.2 2120,892.5 2120,1068.97 ; C302.1 v1(2697.11,1068.97) 2120,1068.97 ; 2784.61,1011.47 2942.11,1011.47 3166.36,1235.72 v1@3166.36,1323.97 ; U301.25 v1@3166.36,1323.97 ; U301.21 3292.34,1359.21 3257.11,1323.97 v1@3166.36,1323.97 ; v1(3602.11,1203.97) 3624.61,1181.47 R302.1 3644.61,1086.47 3777.11,1086.47 3854.61,1008.97 3854.61,478.97 P301.6 ; 1683.36,1287.72 1683.36,1252.72 R501.2 1867.11,1068.97 2120,1068.97
  Bottom Layer w20: C204.1 1034.64,208.97 1112.11,208.97 ; C204.1@1034.58,248.97 1062.11,248.97 1112.11,298.97 U203.1 v1@1112.11,515 ; R206.2 1110.61,496.5 ; U203.16 1112.11,208.97 ; v1(1112.11,238.97) 1112.11,208.97 ; U201.11 1314.61,630.67 1363.8,581.47 v1(1367.11,581.47) 1371.11,577.47 1441.68,577.47 1562.11,457.04 R208.2 ; 1468.96,554.54 1546.42,632 1546.42,1090.78 v1(1554.61,1098.97) ; v1(2697.11,1068.97) 2727.11,1068.97 C301.1@2764.61,1031.47 ; R301.1@3152.11,1046.47 3227.18,1046.47 3284.68,1103.97 R303.1 3292.11,1207.97 ; C307.1@3164.61,1273.97 v1@3164.61,1333.97 ; C306.1 3164.61,1338.97 v1(3167.11,1336.47) ; C307.1@3172.11,1274.04 C307.1@3172.11,1281.47 ; C307.1@3184.61,1273.97 C307.1@3184.61,1281.47 ; C307.1@3192.11,1274.04 3255.68,1210.47 3595.61,1210.47 v1(3602.11,1203.97)
VCC_FB: R411.1 R412.2 U401.3 | length 439
  Top Layer w12: U401.3 1948.49,1715.09 1955.86,1707.72
  Top Layer w20: R411.1 1979.61,1498.97 ; 1955.86,1707.72 1982.11,1681.47 1982.11,1501.47 ; 1989.61,1508.97 2042.11,1508.97 R412.2
VCC_OUT: C410.1 C411.1 L402.2 R410.2 R411.2
  other v1: 1844.61,1516.47 1882.11,1516.47
VCCH: C101.+ C102.+ C103.1 C202.1 C414.1 C415.2 L101.5 L401.2 Q401.5 Q401.6 Q401.7 Q401.8 Q403.5 Q403.6 Q403.7 Q403.8 Q405.5 Q405.6 Q405.7 Q405.8 R201.2 R502.2 U201.3 U401.29 | length 1565.4
  Top Layer w20: R201.2 511.47,1613.97 v2(512.5,1615) ; Q405.6 1500,2307.5 C414.1 ; 1300,2057.5 1392.5,2057.5 v2(1402.5,2047.5) ; 1537.5,2216.47 1603.97,2216.47 1615,2227.5
  Bottom Layer w20: v2@510,1612.5 v2(512.5,1615) 600,1615 774,1441 1221,1441 v2(1225,1445) ; C202.1@1182.11,956.47 v1@1257.11,956.47 ; U201.3 v1(1264.61,948.97) ; v2(1402.5,2047.5) L401.2@1465,1985
  other v2: 1527.11,2233.97 1574.61,2236.47 1622.5,2240 1574.61,2276.47
VCCH_FILT: C407.1 C408.1 L401.1 U401.53 U401.54 | length 479.9
  Top Layer w12: U401.53 v2@1616.3,1734.78
  Top Layer w20: 1549.3,1725 1615.64,1725 v2(1622.11,1731.47)
  Bottom Layer w20: L401.1 1604.25,1758.25 ; 1615,1747.5 1604.25,1758.25 ; C407.1@1666.39,1758.25 1604.25,1758.25
  Bottom Layer w30: v2@1628.11,1737.47 1757.4,1737.47 C408.1@1792.11,1772.17 ; C408.1@1792.11,1768.97 C408.1@1792.11,1772.17 ; C408.1 C408.1@1792.11,1772.17
pads on no net: P301.3 P301.5 U201.13 U203.3 U203.6 U203.11 U203.14 U203.15 U301.1 U301.4 U301.5 U301.6 U301.7 U301.9 U301.10 U301.12 U301.13 U301.14 U301.15 U301.16 U301.23 U301.24 U301.41 U301.42 U301.43 U301.49 U301.53 U301.60 U301.61 U301.62 U301.63 U301.64 U401.25 U401.26 U401.55

## Polygon pours and split planes (outlines as drawn)
PWR_- on Top Layer "Top Layer-No Net" (solid, remove dead copper, pour order 26): 295,672.5 0,672.5 0,582.5 0,572.5 295,572.5
PWR_+ on Top Layer "Top Layer-No Net" (solid, remove dead copper, pour order 22): 295,840 0,840 0,745 0,742.5 295,742.5
M_U on Top Layer "Top Layer-No Net" (solid, pour order 17): 1125,1750 1110,1765 902.5,1765 892.5,1755 892.5,1590 920,1562.5 932.5,1550 932.5,1485 987.5,1485 987.5,1575 1025,1612.5 1090,1612.5 1125,1647.5
M_V on Top Layer "Top Layer-No Net" (solid, remove dead copper, pour order 30): 1125,2100 1112.5,2112.5 1090,2112.5 895,2112.5 882.5,2100 882.5,1892.5 932.5,1842.5 985,1842.5 995,1852.5 995,1925 1025,1955 1095,1955 1125,1985
NetC409_1 on Top Layer "Top Layer-No Net" (solid, remove dead copper, pour order 28): 1477.11,1598.97 1477.11,1548.97 1444.61,1516.47 1444.61,1456.47 1464.61,1436.47 1532.11,1436.47 1554.61,1458.97 1554.61,1506.47 1512.11,1548.97 1512.11,1598.97 1499.61,1611.47 1484.61,1611.47
VCC_OUT on Top Layer "Top Layer-No Net" (solid, remove dead copper, pour order 27): 1907.11,1601.47 1907.11,1511.47 1884.61,1488.97 1884.61,1326.47 1824.61,1326.47 1824.61,1518.97 1847.11,1541.47 1847.11,1601.47
VCCH on Top Layer "Top Layer-No Net" (solid, pour order 29): 1485,2314.36 1493.14,2322.5 1660,2322.5 1660,2259.36 1602.11,2201.47 1539.61,2201.47 1485,2256.08
M_W on Top Layer "Top Layer-No Net" (solid, pour order 20): 1087.5,2447.5 905,2447.5 892.5,2435 892.5,2272.5 930,2235 930,2155 990,2155 990,2210 995,2215 995,2262.5 1027.5,2295 1092.5,2295 1122.5,2325 1122.5,2440 1114.35,2448.15
VCCH on Top Layer "Top Layer-No Net" (solid, remove dead copper, pour order 37): 682.5,842.5 682.5,740 870,740 1045,740 1152.5,632.5 1305,632.5 1305,2415 1295,2425 1220,2425 1185,2390 1185,1270 1185,1115 1185,925 1157.5,912.5 1157.5,897.5 1102.5,842.5
GND on Top Layer "Top Layer-No Net" (solid, remove dead copper, pour order 39): -15,2590 -15,-40 4012.5,-40 3995,-40 3995,2602.5
GND on Bottom Layer "Top Layer-No Net" (solid, remove dead copper, pour order 25): -40,2617.5 -40,-40 4012.5,-40 4012.5,2612.5 3985,2612.5
M_V on Bottom Layer "Top Layer-No Net" (solid, remove dead copper, pour order 31): 852.5,1922.49 892.5,1882.5 967.5,1882.5 1067.5,1982.5 1120,1982.5 1127.5,1990 1127.5,2097.5 1112.5,2112.5 895,2112.5 825,2042.5 767.5,1985 515,1985 500,1985 482.5,1967.5 482.5,1945 482.5,1942.5 495,1930 500,1925 -13606.06,1925
VCC_OUT on Bottom Layer "Top Layer-No Net" (solid, remove dead copper, pour order 24): 1744.61,1613.97 1744.61,1388.97 1792.11,1388.97 1894.61,1491.47 1894.61,1503.97 1784.61,1613.97
M_U on Bottom Layer "Top Layer-No Net" (solid, pour order 18): 1125,1752.5 1125,1647.5 1100,1622.5 947.5,1622.5 912.5,1587.5 827.5,1587.5 695,1720 480,1720 477.5,1722.5 475,1725 475,1792.5 480,1797.5 492.5,1797.5 762.5,1797.5 797.5,1762.5 1115,1762.5
M_W on Bottom Layer "Top Layer-No Net" (solid, pour order 21): 477.5,2157.5 477.5,2145 500,2122.5 635,2122.5 780,2267.5 995,2267.5 1035,2307.5 1110,2307.5 1125,2322.5 1125,2440 1112.5,2452.5 862.5,2452.5 820,2410 602.5,2192.5 600,2190 510,2190 500,2190 477.5,2167.5

## Keep-outs
Keep-Out Layer:
  rectangle: -66.49,-63.53 4049.61,-20.39
  rectangle: 3989.61,-36.03 4042.11,2646.47
  rectangle: -70.39,2593.97 4012.11,2643.97
  rectangle: -70.39,-43.53 -20.39,2613.97

## Other copper
Top Layer:
  text "+" at 142.5,917.5 h60
  text "-" at 142.5,447.5 h60
  text "PREN2, ET-Gruppe" at 2010,205 h30
  text "daniw & ystuder 11.3.2015" at 1887.5,152.5 h30

## Silkscreen, mask and mechanical layers (free items; w line width, h text height)
Mechanical 1:
  lines w10: -62.89,-6.03 ccw(c-12.89,-6.03) -12.89,-56.03 3982.11,-56.03 ccw(c3982.11,-6.03) 4032.11,-6.03 4032.11,2581.47 4032.11,2586.47 ccw(c3982.11,2586.47) 3982.11,2636.47 -12.89,2636.47 ccw(c-12.89,2586.47) -62.89,2586.47 -62.89,-6.03

## Text inside footprints (layer, text, board x,y; h text height)
P103: Top Overlay "1" at 3117.11,2073.97 h50; Top Overlay "2" at 3097.11,2173.97 h50; Top Overlay "5" at 3457.11,2073.97 h50; Top Overlay "6" at 3457.11,2173.97 h50
P301: Top Overlay "1" at 3634.61,658.97 h50 r270; Top Overlay "2" at 3734.61,678.97 h50 r270; Top Overlay "5" at 3634.61,318.97 h50 r270; Top Overlay "6" at 3734.61,318.97 h50 r270